# Altium PCB PCB.PcbDoc
Units mm, origin at the board's own origin, x right, y up, seen from the top; angles counter-clockwise.
Board outline 94 x 61.5 mm, 2 copper layers (Top Layer, Bottom Layer); 65 components, 51 nets, 196 pads, 5 vias.
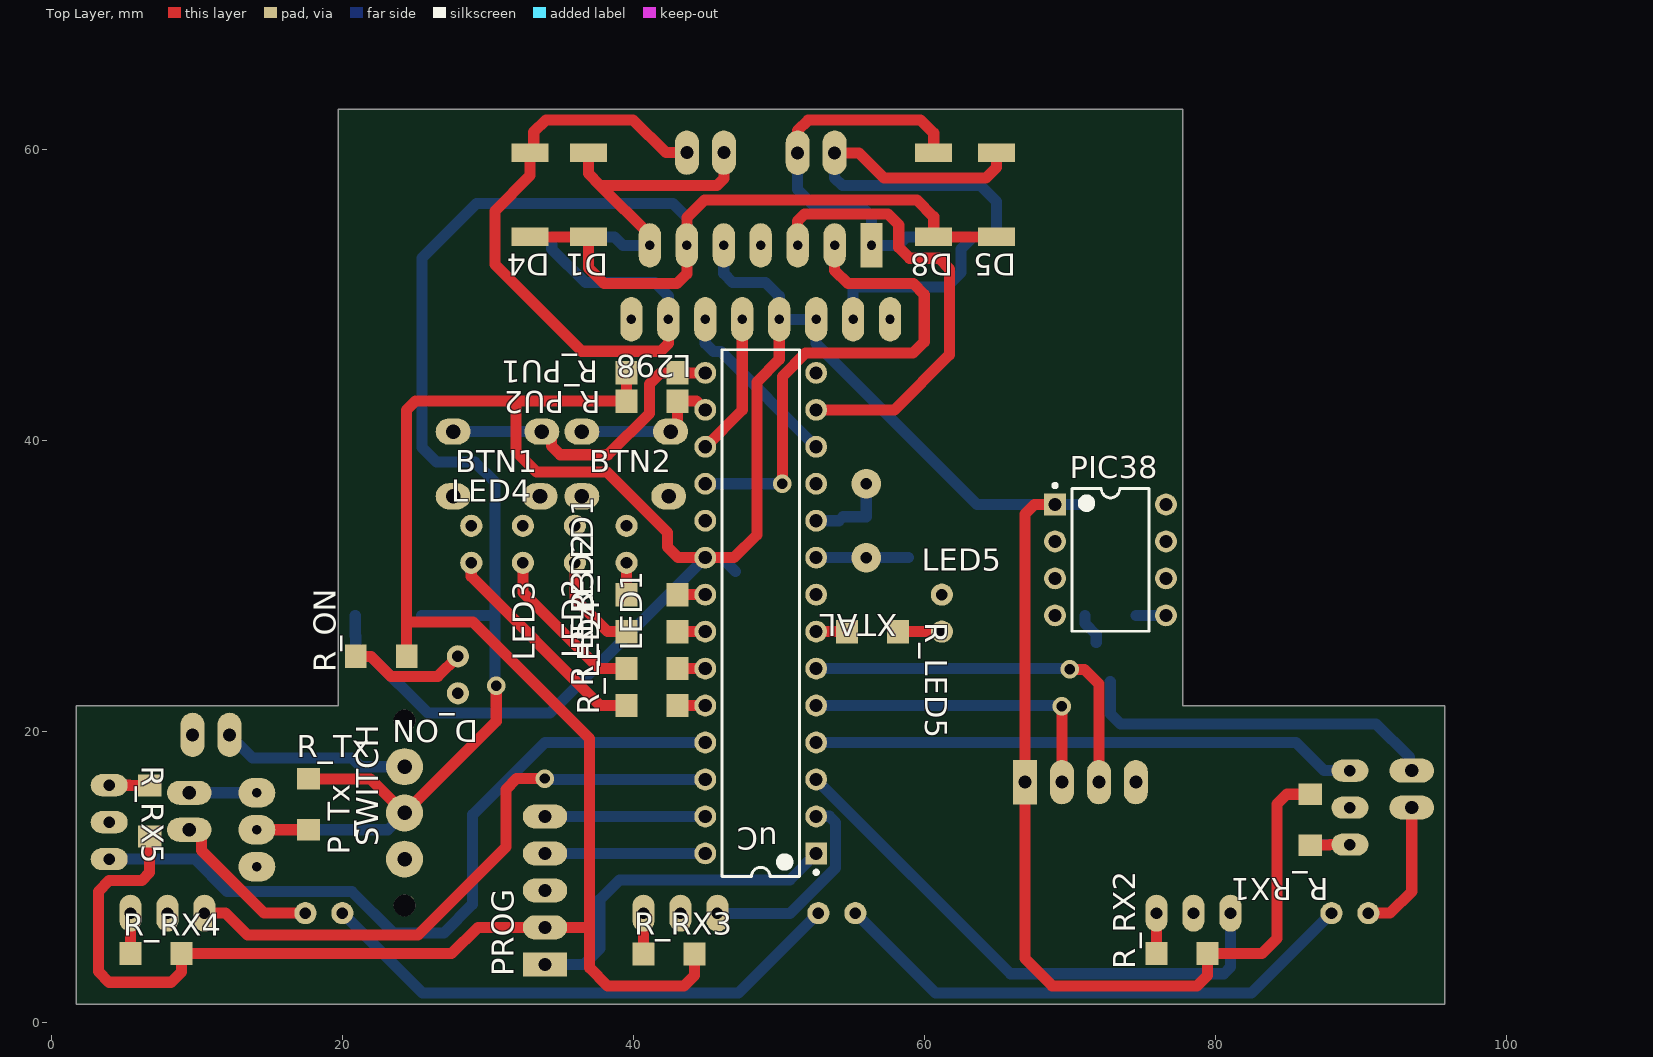
[diagram p0: Top Layer view]
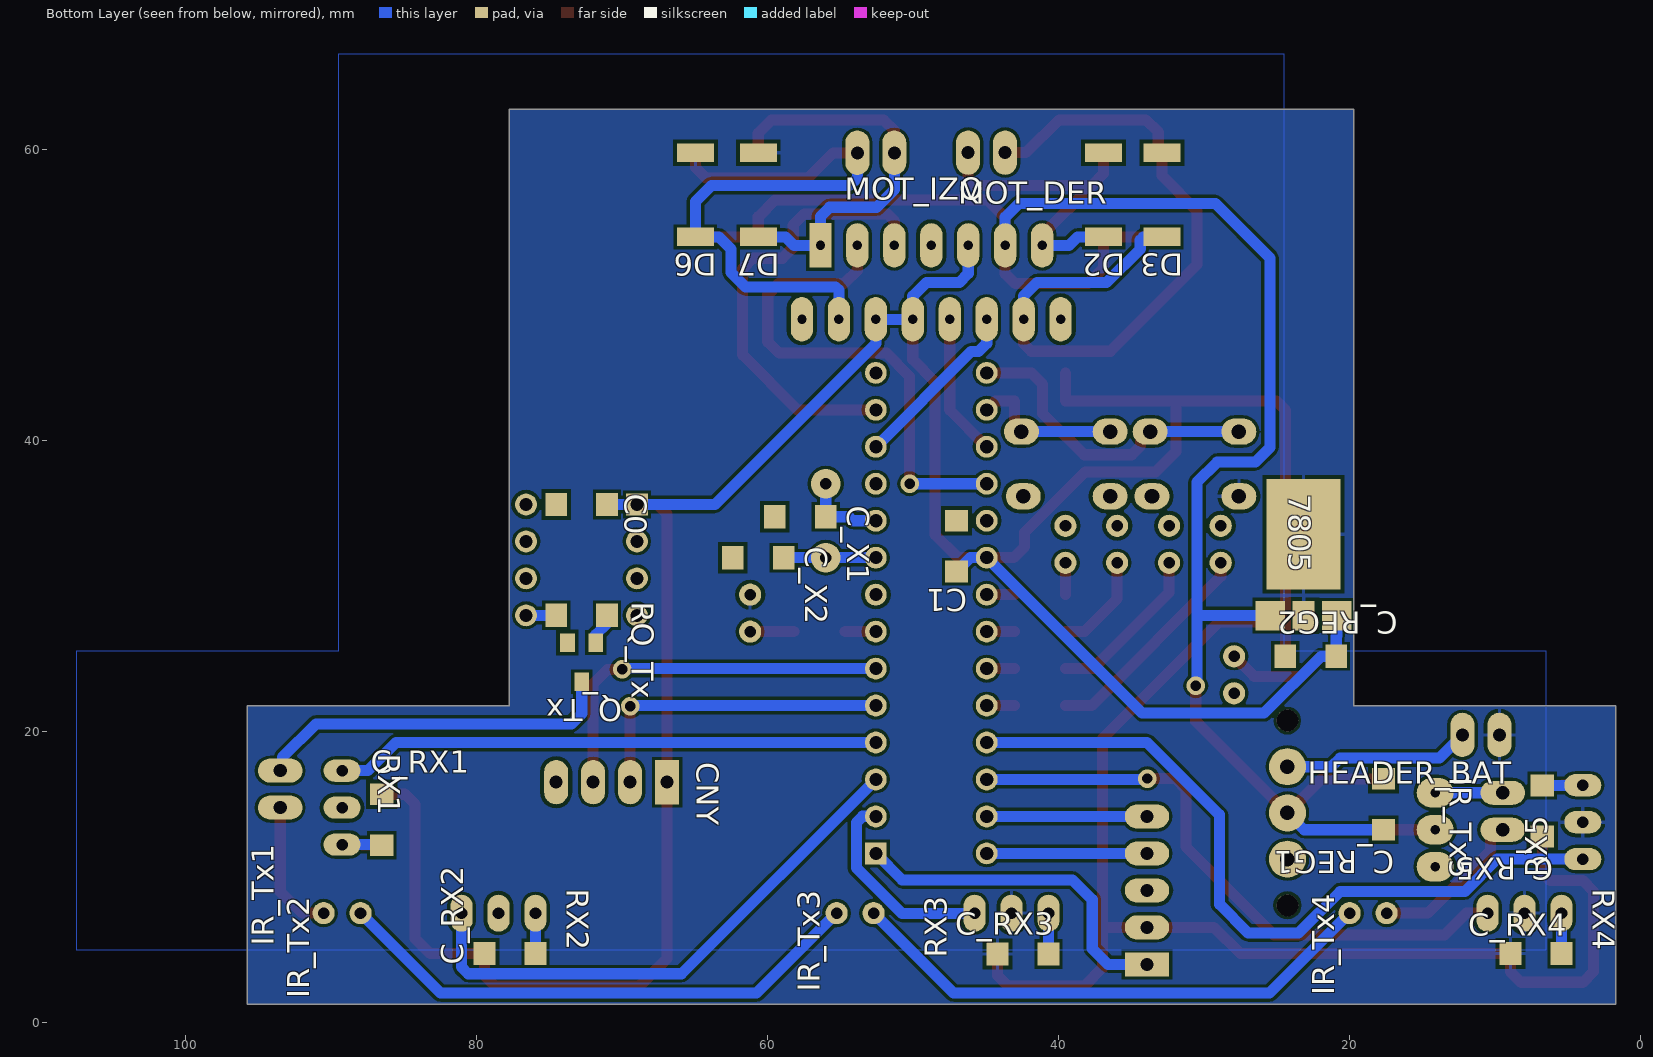
[diagram p1: Bottom Layer view, seen from below]
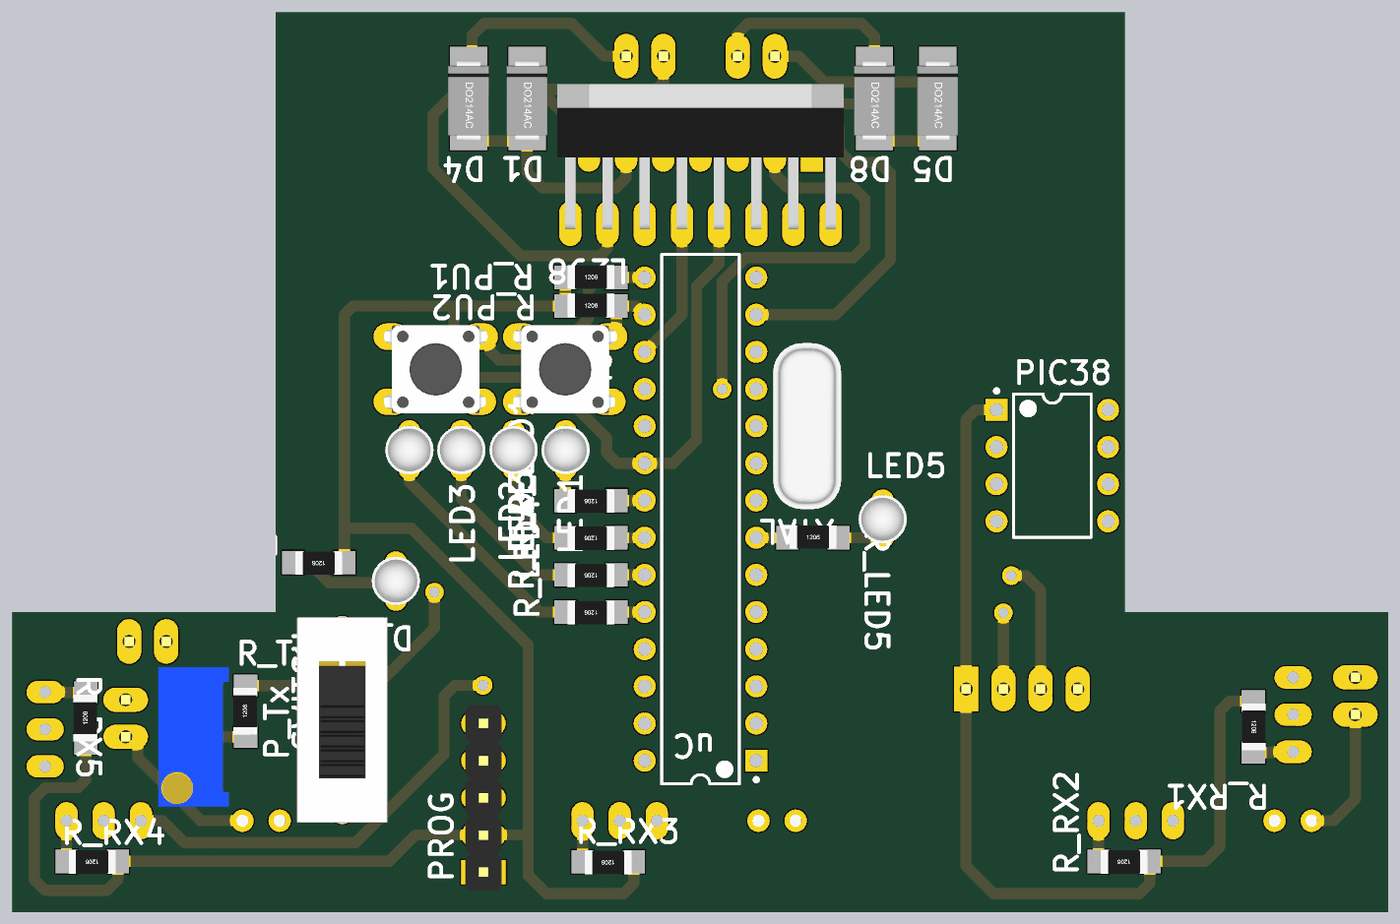
[diagram p2: 3D render of the assembled board from above, using the file's embedded part models]
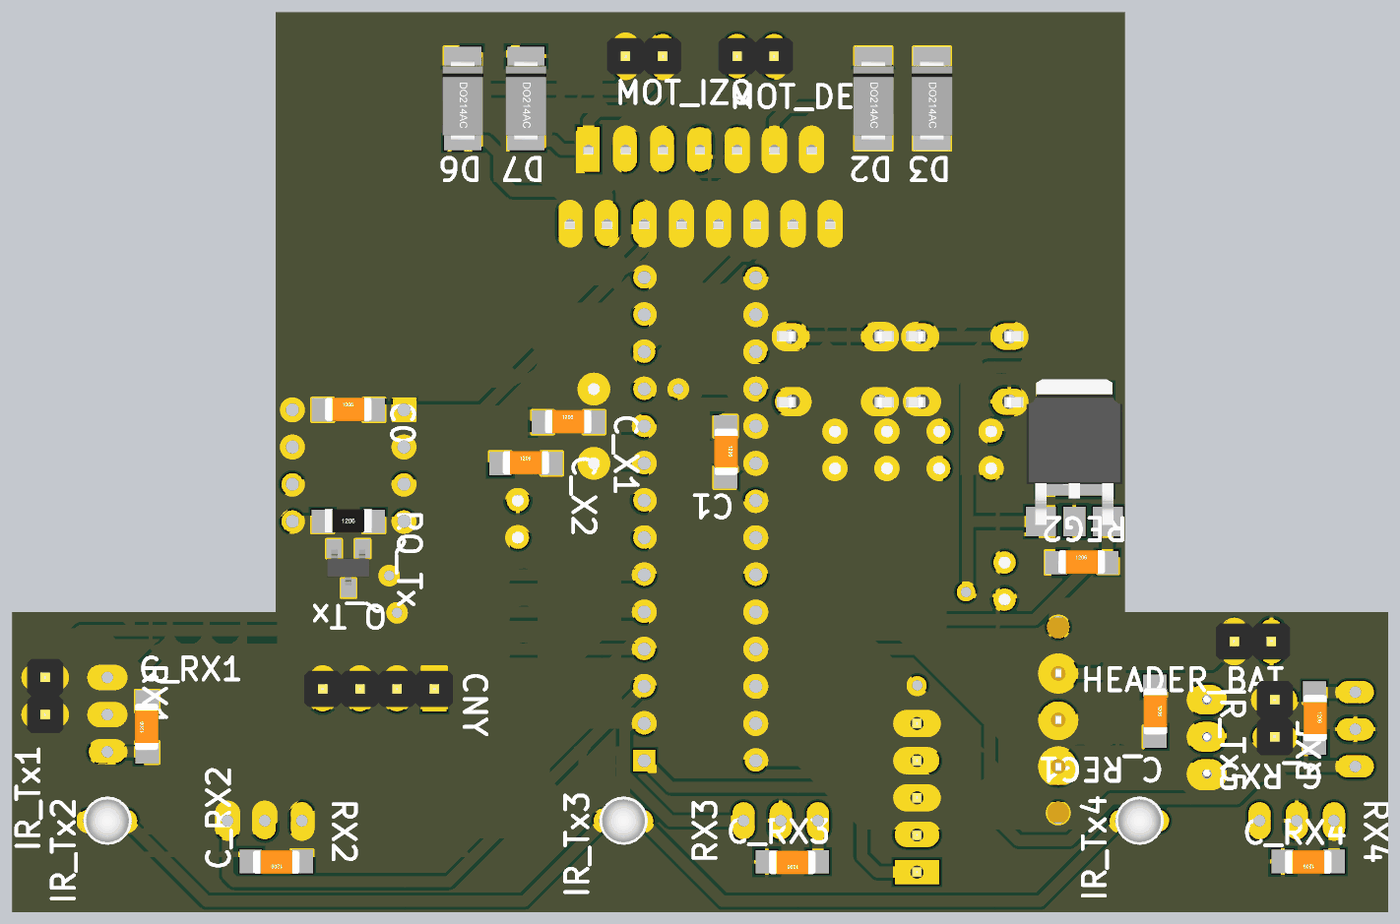
[diagram p3: 3D render of the assembled board from below, using the file's embedded part models]

## Layer stack, top to bottom
Top Solder: solder mask 0.0102, Solder Resist, Dk 3.5
Top Layer: signal copper 0.0356
Dielectric 1: dielectric 0.32, FR-4, Dk 4.8
Bottom Layer: signal copper 0.0356
Bottom Solder: solder mask 0.0102, Solder Resist, Dk 3.5

## Board outline
1.75,1.25 1.75,21.75 19.75,21.75 19.75,62.75 77.75,62.75 77.75,21.75 95.75,21.75 95.75,1.25

## Design rules (kind name [scope] priority, off if disabled: settings)
Clearance [All] p1: gap=0.203
ComponentClearance [All] p1: gap=0 collisioncheckmode=3 verticalgap=0 showdistances=FALSE
PolygonConnect [All] p1: connectstyle=Relief reliefconductorwidth=0.254 reliefentries=4 polygonreliefangle="90 Angle" airgapwidth=0.254
RoutingVias [All] p1: holewidth=0.711 width=1.27 viastyle="Through Hole" minholewidth=0.711 minwidth=1.27 maxholewidth=0.711 maxwidth=1.27
SolderMaskExpansion [All] p1: expansion=0.102
Width [All] p1: maxlimit=0.762 minlimit=0.203 preferedwidth=0.762
29 further rules are at their usual default settings.

## Components (designator, comment, footprint, x,y, rotation, side; value= is the part's Value field where it differs from the comment)
7805 "LM7805" TO-252 24.458,34.044 r180 bottom
BTN1 "SWITCH" TACT_SWITCH-SMALL-4PIN 28.139,36.142 r0 top
BTN2 "SWITCH" TACT_SWITCH-SMALL-4PIN 36.983,36.142 r0 top
C0 "CAP-CER" CAP-1206 72.79,35.58 r180 bottom
C1 "CAP-CER" CAP-1206 47.026,32.714 r270 bottom
C_REG1 "CAP-CER" CAP-1206 17.692,14.98 r270 bottom
C_REG2 "CAP-CER" CAP-1206 22.688,25.147 r180 bottom
C_RX1 "CAP-CER" CAP-1206 86.53,13.92 r90 bottom
C_RX2 "CAP-CER" CAP-1206 77.71,4.72 r0 bottom
C_RX3 "CAP-CER" CAP-1206 42.46,4.69 r0 bottom
C_RX4 "CAP-CER" CAP-1206 7.21,4.72 r0 bottom
C_RX5 "CAP-CER" CAP-1206 6.78,14.52 r270 bottom
C_X1 "CAP-CER" CAP-1206 57.766,34.734 r180 bottom
C_X2 "CAP-CER" CAP-1206 60.655,31.924 r180 bottom
CNY "Header 1x4" "Header 1x4" 66.92,16.5 r270 bottom
D1 "" DO-214AC 37.177,57.214 r270 top
D2 "" DO-214AC 36.669,57.214 r270 bottom
D3 "" DO-214AC 32.669,57.214 r270 bottom
D4 "" DO-214AC 33.177,57.214 r270 top
D5 "" DO-214AC 65.227,57.214 r270 top
D6 "" DO-214AC 64.719,57.214 r270 bottom
D7 "" DO-214AC 60.399,57.214 r270 bottom
D8 "" DO-214AC 60.907,57.214 r270 top
D_ON "LED" LED-3MM-RED 27.96,23.877 r270 top
HEADER_BAT "" "HEADER 1x2" 11,19.75 r90 bottom
IR_Tx1 "IR383" "HEADER 1x2" 93.5,16.02 r0 bottom
IR_Tx2 "LED" LED-3MM-YELLOW 89.25,7.5 r0 bottom
IR_Tx3 "LED" LED-3MM-YELLOW 54,7.5 r0 bottom
IR_Tx4 "LED" LED-3MM-YELLOW 18.75,7.5 r0 bottom
IR_Tx5 "IR383" "HEADER 1x2" 9.5,14.5 r0 bottom
L298 "L298" Multiwatt15 58.926,53.384 r270 top
LED1 "LED" LED-3MM-RED 39.547,32.844 r90 top
LED2 "LED" LED-3MM-RED 35.997,32.844 r90 top
LED3 "LED" LED-3MM-RED 32.426,32.844 r90 top
LED4 "LED" LED-3MM-RED 28.878,32.844 r90 top
LED5 "LED" LED-3MM-RED 61.211,28.114 r90 top
MOT_DER "" "HEADER 1x2" 44.966,59.754 r90 bottom
MOT_IZQ "" "HEADER 1x2" 52.576,59.744 r90 bottom
P_Tx "POT" POT-10TURN 14.142,13.23 r90 top
PIC38 "PIC12F683-I/P" PDIP300-P8 72.8,31.77 r0 top
PROG "" "Header 1x5" 33.943,3.984 r180 top
Q_Tx "NPN" SOT-23 65.795,22.892 r0 bottom
R_LED1 "RES" RES-1206 41.286,29.384 r180 top
R_LED2 "RES" RES-1206 41.286,26.844 r180 top
R_LED3 "RES" RES-1206 41.286,24.304 r180 top
R_LED4 "RES" RES-1206 41.286,21.764 r180 top
R_LED5 "RES" RES-1206 56.455,26.844 r0 top
R_ON "RES" RES-1206 22.688,25.147 r180 top
R_PU1 "RES" RES-1206 41.286,44.624 r0 top
R_PU2 "RES" RES-1206 41.286,42.682 r0 top
R_RX1 "RES" RES-1206 86.53,13.92 r270 top
R_RX2 "RES" RES-1206 77.71,4.72 r180 top
R_RX3 "RES" RES-1206 42.46,4.69 r180 top
R_RX4 "RES" RES-1206 7.21,4.72 r180 top
R_RX5 "RES" RES-1206 6.78,14.52 r90 top
R_Tx "RES" RES-1206 17.692,14.98 r90 top
RQ_Tx "RES" RES-1206 72.79,27.96 r180 bottom
RX1 "TSSP58038" TSSP58038 89.25,14.75 r270 bottom
RX2 "TSSP58038" TSSP58038 78.5,7.5 r180 bottom
RX3 "TSSP58038" TSSP58038 43.25,7.5 r180 bottom
RX4 "TSSP58038" TSSP58038 8,7.5 r180 bottom
RX5 "TSSP58038" TSSP58038 4,13.75 r90 bottom
SWITCH "SLIDE-SWITCH" SWITCH 24.294,14.385 r270 top
uC "PIC18F2550-I/SP" SPDIP300-SP28 48.766,28.114 r180 top
XTAL "CRYSTAL-OSC" HC-49/S 56.016,34.972 r270 top

## Footprints (in the part's own frame and the unit in brackets; to place one, negate y for a bottom-side part, rotate by r counter-clockwise, add the part's x,y. Pads: shape width x height; smd on the part's side, far side on the other; paste and mask are expansions set on the pad)
CAP-1206 [mm]
  rect 1.5x1.6 smd: 1(-1.75,0) 2(1.75,0)
  body extent -1.6,-0.76 1.6,0.84, height 1.26
DO-214AC [mil]
  rect 50x100 smd: A(-100,-10) K(128.01,-9.99)
  body extent -88,-65 128,45, height 95
HC-49/S [mil]
  round 80 hole 31.5: 1(-80,0) 2(120,0)
  body extent -203,-90 243,93, height 138
"HEADER 1x2" [mil]
  oval 120x65 hole 35.43: 1(0,50) 2(0,-50)
  body extent -49,-100 49,100, height 336
"Header 1x4" [mil]
  rect 120x65 hole 35.43: 1(0,0)
  oval 120x65 hole 35.43: 2(0,-100) 3(0,-200) 4(0,-300)
  body extent -49,-350 49,50, height 336
"Header 1x5" [mil]
  rect 120x65 hole 35.43: 1(0,0)
  oval 120x65 hole 35.43: 2(0,-100) 3(0,-200) 4(0,-300) 5(0,-400)
  body extent -49,-450 49,50, height 336
LED-3MM-RED [mil]
  round 60 hole 31.5: A(-50,0) K(50,0)
  body extent -66,-65 64,65, height 217
LED-3MM-YELLOW [mil]
  round 60 hole 31.5: A(-50,0) K(50,0)
  body extent -66,-65 64,65, height 217
Multiwatt15 [mil]
  oval 120x60 hole 25: 1(200,-750) 2(0,-700) 3(200,-650) 4(0,-600) 5(200,-550) 6(0,-500) 7(200,-450) 8(0,-400) 9(200,-350) 10(0,-300) 11(200,-250) 12(0,-200) 13(200,-150) 15(200,-50)
  rect 120x60 hole 25: 14(0,-100)
  body extent -175,-786 214,-14, height 831
PDIP300-P8 [mm] "DIP, 8-Leads, Row Spacing 7.62mm, Pitch 2.54mm, Body 9.5x6.6mm"
  rect 1.5x1.5 hole 0.9: 1(-3.81,3.81)
  round 1.5 hole 0.9: 2(-3.81,1.27) 3(-3.81,-1.27) 4(-3.81,-3.81) 5(3.81,-3.81) 6(3.81,-1.27) 7(3.81,1.27) 8(3.81,3.81)
  silkscreen extent -3.93,-4.9 2.65,5.23, body extent -3.55,-4.9 3.55,4.9, height 5.34
POT-10TURN [mil]
  oval 80x100 hole 25: 1(-100,0) 2(0,0) 3(100,0)
  body extent -188,-94 188,94, height 455
RES-1206 [mm]
  rect 1.5x1.6 smd: 1(-1.75,0) 2(1.75,0)
  body extent -1.6,-0.76 1.6,0.84, height 0.68
SOT-23 [mm]
  rect 1.016x1.27 smd: B(6.025,-3.2) C(6.985,-0.508) E(7.975,-3.2)
  body extent 5.54,-3.15 8.46,-0.67, height 0.95
SPDIP300-SP28 [mm] "DIP, 28-Leads, Row Spacing 7.62mm, Pitch 2.54mm, Body 34.9x6.8mm"
  rect 1.5x1.5 hole 0.9: 1(-3.81,16.51)
  round 1.5 hole 0.9: 2(-3.81,13.97) 3(-3.81,11.43) 4(-3.81,8.89) 5(-3.81,6.35) 6(-3.81,3.81) 7(-3.81,1.27) 8(-3.81,-1.27) 9(-3.81,-3.81) 10(-3.81,-6.35) 11(-3.81,-8.89) 12(-3.81,-11.43) 13(-3.81,-13.97) 14(-3.81,-16.51) 15(3.81,-16.51) 16(3.81,-13.97) 17(3.81,-11.43) 18(3.81,-8.89) 19(3.81,-6.35) 20(3.81,-3.81) 21(3.81,-1.27) 22(3.81,1.27) 23(3.81,3.81) 24(3.81,6.35) 25(3.81,8.89) 26(3.81,11.43) 27(3.81,13.97) 28(3.81,16.51)
  silkscreen extent -3.94,-18.1 2.65,18.1, body extent -3.55,-18.1 3.55,18.1, height 5.08
SWITCH [mm]
  round 2.54 hole 1: 1(-3.175,0) 2(0,0) 3(3.175,0)
  round 1.5 hole 1.5: 4(-6.35,0) 4(6.35,0)
  body extent -7,-3.1 7,3.1, height 9.65
TACT_SWITCH-SMALL-4PIN [mm]
  oval 2.4x1.8 hole 1: 1(-0.508,4.445) 1(5.588,4.445) 2(-0.508,0) 2(5.461,0)
  body extent -1.45,-0.79 6.53,5.21, height 5.15
TO-252 [mil]
  rect 80x80 smd: 1(-40,-240) 3(140,-240)
  rect 200x300 smd: 2(50,-20)
  rect 60x80 smd: 2(50,-240)
  body extent -79,-249 179,142, height 95
TSSP58038 [mm]
  oval 1.524x2.54 hole 0.8: 1(-2.54,0) 2(0,0) 3(2.54,0)

## Part data
D1 D2 D3 D4 D5 D6 D7 D8: library part DIODE
HEADER_BAT IR_Tx1 IR_Tx5 MOT_DER MOT_IZQ: library part "Header 1x2"
PIC38: "Flash-Based 8-Bit CMOS Microcontroller with nanoWatt Technology, 2K (x14-Bit words) Program Memory, 384 Bytes Data Memory, 8-Pin PDIP, Industrial Temperature"
PROG: library part "Header 1x5"
uC: "High Performance, Enhanced Flash, USB Microcontroller with nanoWatt Technology, 32K Flash, 28-Pin SPDIP, Industrial Temperature Range"

## Via types
v1: diameter 1.27, hole 0.711, Top Layer to Bottom Layer, 5 vias

## Nets (pads, with @x,y where several pads share a name; then routed paths per layer and width w, separated by ;. In a path a pad name is that pad's centre, name@x,y a point inside that pad or via, vN(x,y) a via of type N, cw(c..) or ccw(c..) an arc to the next point about the centre after c; other vN are vias at no path point)
38KHZ: PIC38.5 RQ_Tx.1 | length 2.1
  Bottom Layer w0.762: RQ_Tx.1 PIC38.5
BTN1: BTN1.1 R_PU1.2 uC.15 | length 22.1
  Top Layer w0.762: BTN1.1@33.727,40.587 34.392,40.587 34.392,39.596 34.99,38.998 38.267,38.998 41.111,41.843 41.111,43.861 41.874,44.624 R_PU1.2 uC.15
  Bottom Layer w0.762: BTN1.1@27.631,40.587 BTN1.1@33.727,40.587
BTN2: BTN2.1 R_PU2.2 uC.16 | length 10.6
  Top Layer w0.762: BTN2.1@42.571,40.587 43.036,41.052 R_PU2.2 44.358,42.682 uC.16
  Bottom Layer w0.762: BTN2.1@36.475,40.587 BTN2.1@42.571,40.587
CNY1: CNY.2 uC.5 | length 22.2
  Top Layer w0.762: CNY.2 v1(69.46,21.71)
  Bottom Layer w0.762: uC.5 69.486,21.764 69.46,21.738 v1(69.46,21.71)
CNY2: CNY.3 uC.6 | length 26.6
  Top Layer w0.762: v1(70,24.25) 71,24.25 72,23.25 CNY.3
  Bottom Layer w0.762: uC.6 69.946,24.304 v1(70,24.25)
DIR_D: L298.7 uC.17 | length 9.8
  Top Layer w0.762: uC.17 47.496,42.084 L298.7
DIR_I: L298.12 uC.18 | length 35.2
  Top Layer w0.762: v1(50.25,37) 50.25,44.385 51.848,45.983 59.233,45.983 60,46.75 60,50 59.25,50.75 54.75,50.75 53.846,51.654 L298.12
  Bottom Layer w0.762: uC.18 v1@50.25,37.004
GND: 7805.2 BTN1.2 BTN2.2 C0.1 C1.1 C_REG1.1 C_REG2.1 C_RX1.2 C_RX2.2 C_RX3.2 C_RX4.2 C_RX5.2 C_X1.1 C_X2.1 CNY.4 D2.A D3.A D6.A D7.A D_ON.K HEADER_BAT.2 L298.1 L298.8 L298.15 LED1.K LED2.K LED3.K LED4.K LED5.K PIC38.8 PROG.3 Q_Tx.E RX1.2 RX2.2 RX3.2 RX4.2 RX5.2 uC.8 uC.19
IR1: RX1.1 uC.4 | length 37.5
  Bottom Layer w0.762: uC.4 85.532,19.224 87.466,17.29 RX1.1
IR2: RX2.1 uC.3 | length 37.9
  Bottom Layer w0.762: uC.3 65.924,3.336 80.582,3.336 81.04,3.794 RX2.1
IR3: RX3.1 uC.2 | length 14.1
  Bottom Layer w0.762: RX3.1 45.79,7.477 50.789,7.477 53.913,10.601 53.913,13.725 53.481,14.157 52.576,14.157 uC.2
IR4: RX4.1 uC.26 | length 41.8
  Top Layer w0.762: RX4.1 12,7.5 13.5,6 25.207,6 31.25,12.043 31.25,16 31.998,16.748 v1(33.923,16.748)
  Bottom Layer w0.762: v1(33.923,16.748) 33.987,16.684 uC.26
IR5: RX5.1 uC.25 | length 52.1
  Bottom Layer w0.762: RX5.1 9.895,11.21 12.105,9.001 20.664,9.001 23.522,6.143 27.002,6.143 28.97,8.112 28.97,14.259 33.936,19.224 uC.25
LED1: R_LED1.1 uC.21 | length 1.9
  Top Layer w0.762: R_LED1.1 uC.21
LED2: R_LED2.1 uC.22 | length 1.9
  Top Layer w0.762: R_LED2.1 uC.22
LED3: R_LED3.1 uC.23 | length 1.9
  Top Layer w0.762: R_LED3.1 uC.23
LED4: R_LED4.1 uC.24 | length 1.9
  Top Layer w0.762: R_LED4.1 uC.24
LED5: R_LED5.1 uC.7 | length 2.1
  Top Layer w0.762: uC.7 R_LED5.1
NetC_RX1_1: C_RX1.1 R_RX1.2 RX1.3 | length 5.5
  Top Layer w0.762: R_RX1.2 87.847,12.17 87.887,12.21 RX1.3
  Bottom Layer w0.762: C_RX1.1 86.577,12.17 86.577,12.21 RX1.3
NetC_RX2_1: C_RX2.1 R_RX2.2 RX2.3 | length 5.6
  Top Layer w0.762: R_RX2.2 RX2.3
  Bottom Layer w0.762: C_RX2.1 RX2.3
NetC_RX3_1: C_RX3.1 R_RX3.2 RX3.3 | length 5.6
  Top Layer w0.762: R_RX3.2 RX3.3
  Bottom Layer w0.762: C_RX3.1 RX3.3
NetC_RX4_1: C_RX4.1 R_RX4.2 RX4.3 | length 5.6
  Top Layer w0.762: R_RX4.2 RX4.3
  Bottom Layer w0.762: C_RX4.1 RX4.3
NetC_RX5_1: C_RX5.1 R_RX5.2 RX5.3 | length 5.6
  Top Layer w0.762: RX5.3 5.374,16.29 5.394,16.27 R_RX5.2
  Bottom Layer w0.762: RX5.3 4.408,16.29 4.428,16.27 C_RX5.1
NetD1_A: D1.A D2.K L298.2 MOT_DER.1 | length 23.1
  Top Layer w0.762: D1.A D1.A 36.92,58.311 37.732,57.5 ; L298.2 41.146,54.086 37.732,57.5 ; MOT_DER.1 46.236,57.986 45.75,57.5 37.732,57.5
  Bottom Layer w0.762: D2.K 38.724,53.963 39.302,53.384 L298.2
NetD3_K: D3.K D4.A L298.3 MOT_DER.2 | length 51.4
  Top Layer w0.762: L298.3 42.416,46.627 41.899,46.11 36.463,46.11 30.5,52.073 30.5,55.75 32.923,58.173 D4.A 33.169,60 33.169,61.169 34,62 40,62 42.246,59.754 MOT_DER.2
  Bottom Layer w0.762: D3.K 34.199,53.963 34.406,53.756 34.406,53.146 36.717,50.835 41.492,50.835 42.416,49.911 L298.3
NetD5_A: D5.A D6.K L298.13 MOT_IZQ.1 | length 43.5
  Top Layer w0.762: MOT_IZQ.1 55.506,59.744 57.25,58 64.25,58 64.973,58.723 D5.A
  Bottom Layer w0.762: MOT_IZQ.1 53.846,58.023 54.379,57.489 63.881,57.489 64.973,56.397 D6.K 63.34,53.963 62.524,53.146 62.524,51.52 61.533,50.53 55.345,50.53 55.116,50.301 L298.13
NetD7_K: D7.K D8.A L298.14 MOT_IZQ.2 | length 27.8
  Top Layer w0.762: MOT_IZQ.2 51.306,61.274 52.032,62 59.75,62 60.653,61.097 D8.A
  Bottom Layer w0.762: MOT_IZQ.2 51.306,57.21 52.516,56 55.75,56 56.386,55.364 L298.14 58.206,53.384 58.784,53.963 D7.K
NetD_ON_A: D_ON.A R_ON.2 | length 8.2
  Top Layer w0.762: R_ON.2 21.985,25.147 23.374,23.758 26.571,23.758 D_ON.A
NetHEADER_BAT_1: HEADER_BAT.1 SWITCH.1 | length 12.9
  Bottom Layer w0.762: HEADER_BAT.1 13.85,18.17 20.664,18.17 21.275,17.56 SWITCH.1
NetIR_Tx1_1: IR_Tx1.1 IR_Tx2.K | length 9.4
  Top Layer w0.762: IR_Tx2.K 92,7.5 93.5,9 IR_Tx1.1
NetIR_Tx1_2: IR_Tx1.2 Q_Tx.C | length 25.1
  Bottom Layer w0.762: Q_Tx.C 72.78,21.22 73.493,20.507 91.048,20.507 93.334,18.221 93.334,17.29 IR_Tx1.2
NetIR_Tx2_A: IR_Tx2.A IR_Tx3.K | length 37.3
  Bottom Layer w0.762: IR_Tx3.K 60.77,2 82.48,2 IR_Tx2.A
NetIR_Tx3_A: IR_Tx3.A IR_Tx4.K | length 37.3
  Bottom Layer w0.762: IR_Tx4.K 25.52,2 47.23,2 IR_Tx3.A
NetIR_Tx4_A: IR_Tx4.A IR_Tx5.1 | length 11.2
  Top Layer w0.762: IR_Tx5.1 10.327,13.23 10.327,11.795 14.621,7.5 IR_Tx4.A
NetIR_Tx5_2: IR_Tx5.2 P_Tx.3 | length 4.6
  Bottom Layer w0.762: IR_Tx5.2 P_Tx.3
NetLED1_A: LED1.A R_LED1.2 | length 2.2
  Top Layer w0.762: R_LED1.2 39.536,30.464 39.547,30.475 LED1.A
NetLED2_A: LED2.A R_LED2.2 | length 7
  Top Layer w0.762: LED2.A 35.997,29.088 38.241,26.844 R_LED2.2
NetLED3_A: LED3.A R_LED3.2 | length 11.3
  Top Layer w0.762: LED3.A 32.426,29.523 37.645,24.304 R_LED3.2
NetLED4_A: LED4.A R_LED4.2 | length 15.3
  Top Layer w0.762: LED4.A 28.878,30.622 37.736,21.764 R_LED4.2
NetLED5_A: LED5.A R_LED5.2 | length 3
  Top Layer w0.762: R_LED5.2 LED5.A
NetP_Tx_2: P_Tx.2 R_Tx.1 | length 3.6
  Top Layer w0.762: P_Tx.2 R_Tx.1
NetQ_Tx_B: Q_Tx.B RQ_Tx.2 | length 2.2
  Bottom Layer w0.762: RQ_Tx.2 71.04,27.408 71.82,26.628 Q_Tx.B
PGC: PROG.5 uC.27 | length 11
  Bottom Layer w0.762: PROG.5 uC.27
PGD: PROG.4 uC.28 | length 11
  Bottom Layer w0.762: PROG.4 uC.28
PWM_D: L298.5 uC.12 | length 12.2
  Bottom Layer w0.762: L298.5 44.956,46.644 45.515,46.085 46.035,46.085 uC.12
PWM_I: L298.10 uC.13 | length 31.4
  Top Layer w0.762: L298.10 51.306,55.056 51.785,55.535 57.503,55.535 58.25,54.787 58.25,53.25 59,52.5 61,52.5 61.75,51.75 61.75,45.87 57.964,42.084 uC.13
VBAT: 7805.1 C_REG1.2 D1.K D4.K D5.K D8.K L298.4 R_Tx.2 SWITCH.2 | length 127.2
  Top Layer w0.762: R_Tx.2 21.949,16.73 SWITCH.2 30.596,20.687 v1(30.596,23.123) ; D4.K D1.K 36.923,51.827 38,50.75 43,50.75 43.686,51.436 L298.4 43.686,55.289 44.897,56.5 59.5,56.5 60.653,55.347 D8.K D5.K
  Bottom Layer w0.762: C_REG1.2 23.139,13.23 SWITCH.2 ; 7805.1 30.5,27.948 ; v1(30.596,23.123) 30.5,23.219 30.5,27.948 ; L298.4 43.686,55.314 42.75,56.25 29.229,56.25 25.5,52.521 25.5,39.5 26.5,38.5 29.113,38.5 30.5,37.113 30.5,27.948
VCC: 7805.3 C0.2 C1.2 C_REG2.2 CNY.1 L298.6 L298.9 L298.11 PIC38.1 PROG.2 R_ON.1 R_PU1.1 R_PU2.1 R_RX1.1 R_RX2.1 R_RX3.1 R_RX4.1 R_RX5.1 uC.20 | length 299.1
  Top Layer w0.762: R_RX5.1 6.78,10.28 6.25,9.75 4,9.75 3.25,9 3.25,3.5 4,2.75 8.25,2.75 8.96,3.46 R_RX4.1 27.522,4.72 29.326,6.524 PROG.2 37,6.524 ; R_ON.1 24.438,27.5 ; R_PU1.1 R_PU2.1 31.942,42.682 ; R_RX3.1 44.21,3.21 43.5,2.5 38.25,2.5 37,3.75 37,6.524 ; L298.9 50.036,45.536 48.5,44 48.5,33.5 46.924,31.924 uC.20 43.076,31.924 42.356,32.644 42.356,33.644 38.196,37.804 33.364,37.804 31.942,39.227 31.942,42.682 ; PIC38.1 67.58,35.58 66.92,34.92 CNY.1 66.92,4.378 68.798,2.5 78.75,2.5 79.46,3.21 R_RX2.1 83.211,4.72 84.25,5.759 84.25,15 84.92,15.67 R_RX1.1 ; 24.438,27.5 29,27.5 37,19.5 37,6.524 ; 24.438,27.5 24.438,42.072 25.048,42.682 31.942,42.682
  Bottom Layer w0.762: 7805.3 20.902,26.563 20.938,26.527 C_REG2.2 21.993,25.147 25.897,21.244 34.276,21.244 uC.20 46.066,31.924 C1.2 ; L298.6 46.226,51.444 46.836,50.835 49.096,50.835 50.036,49.895 L298.9 L298.11 52.576,46.644 63.64,35.58 PIC38.1 C0.2
VPP: PROG.1 uC.1 | length 23.8
  Bottom Layer w0.762: PROG.1 36.616,3.984 37.708,5.076 37.708,8.442 39.054,9.788 50.76,9.788 uC.1
XTAL1: C_X2.2 uC.9 XTAL.2 | length 6.3
  Bottom Layer w0.762: uC.9 XTAL.2 C_X2.2
XTAL2: C_X1.2 uC.10 XTAL.1 | length 5.8
  Bottom Layer w0.762: uC.10 54.142,34.464 54.412,34.734 C_X1.2 XTAL.1
pads on no net: P_Tx.1 PIC38.2 PIC38.3 PIC38.4 PIC38.6 PIC38.7 SWITCH.3 SWITCH.4 uC.11 uC.14

## Polygon pours and split planes (outlines as drawn)
GND on Bottom Layer "B-GND" (solid, remove dead copper, pour order 2): 19.75,62.75 19.75,21.75 1.75,21.75 1.75,1.25 95.75,1.25 95.75,21.75 77.75,21.75 77.75,62.75 19.75,62.75
GND on Bottom Layer "B-GND" (solid, remove dead copper, shelved, pour order 0): 6.5,5 6.5,25.5 24.5,25.5 24.5,66.5 89.5,66.5 89.5,25.5 107.5,25.5 107.5,5

## Silkscreen, mask and mechanical layers (free items; w line width, h text height)
Mechanical 1:
  the board outline again, w0.254
Mechanical 13:
  lines w0.254: 11,11.25 11,21.75 ; 48.75,1.25 48.75,62.75